# Allegro board prototype_rev1.brd
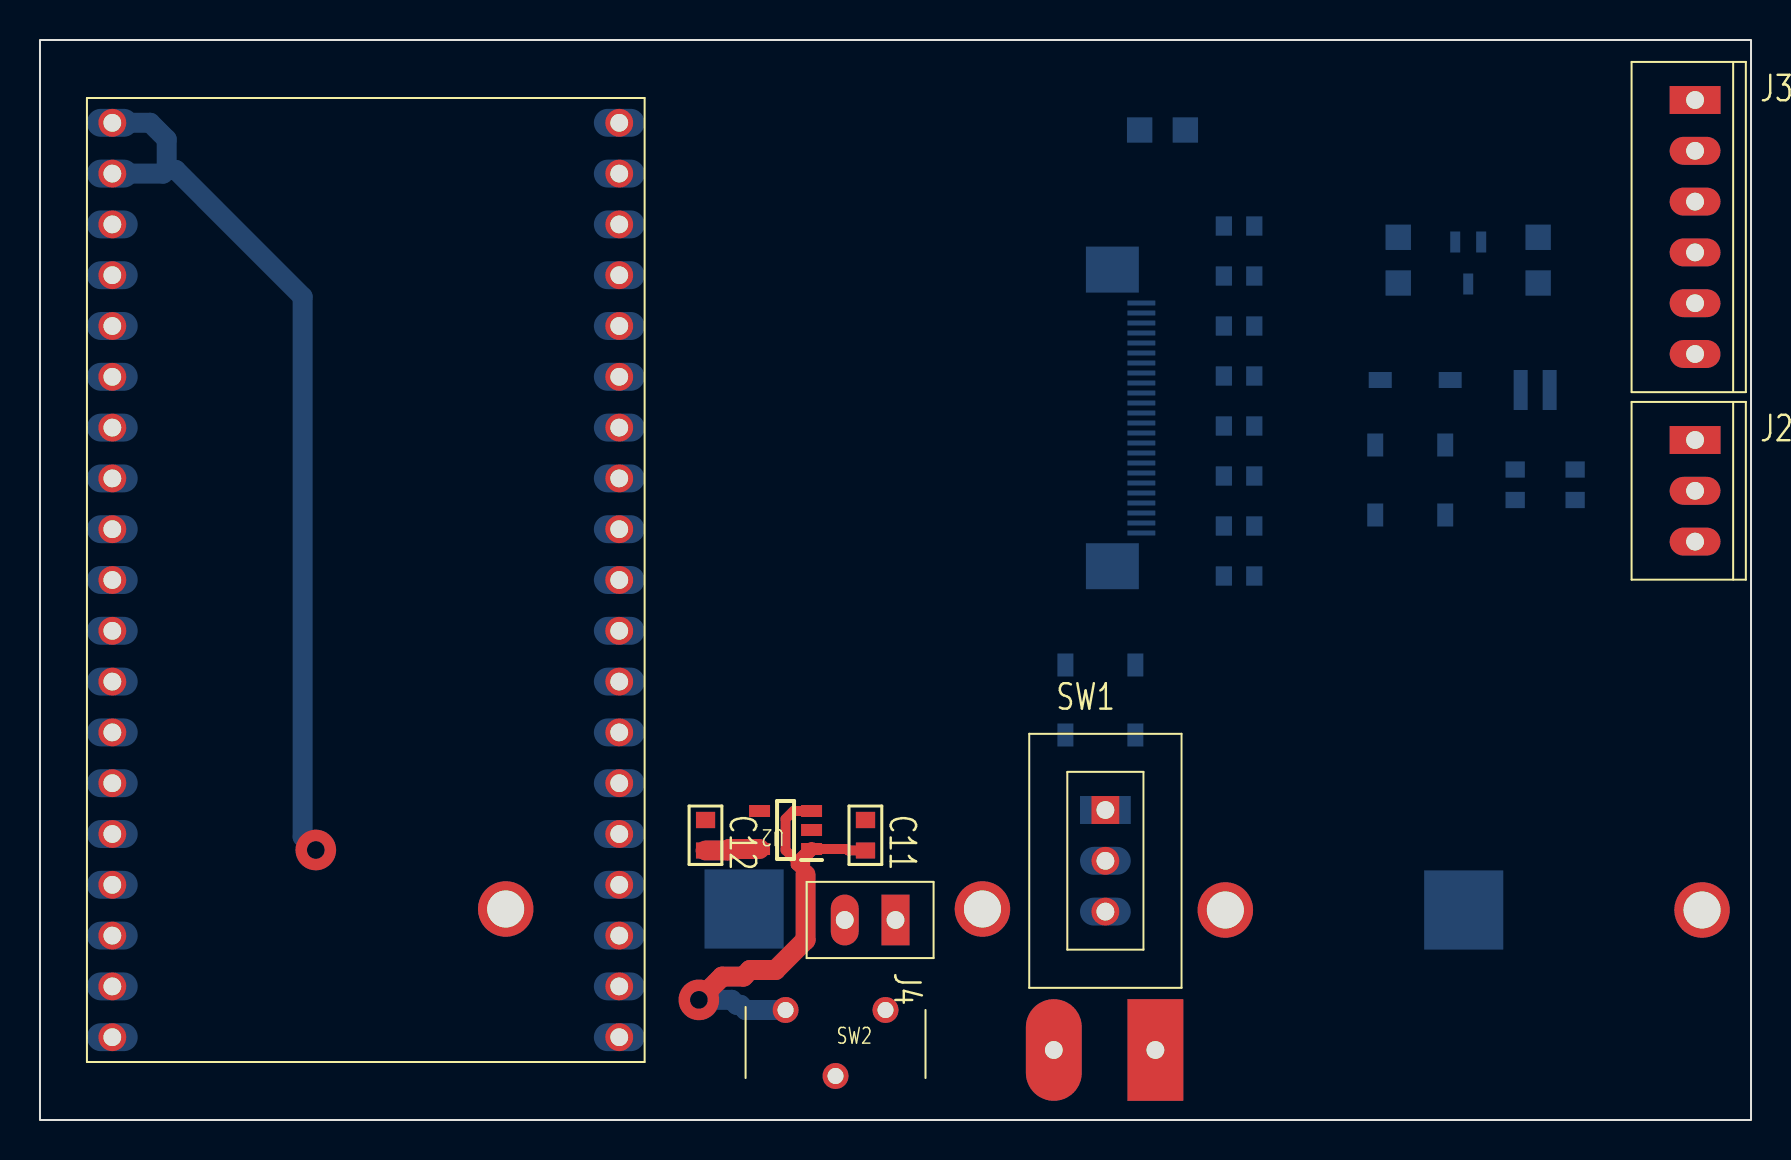
[diagram p0: board, top side]
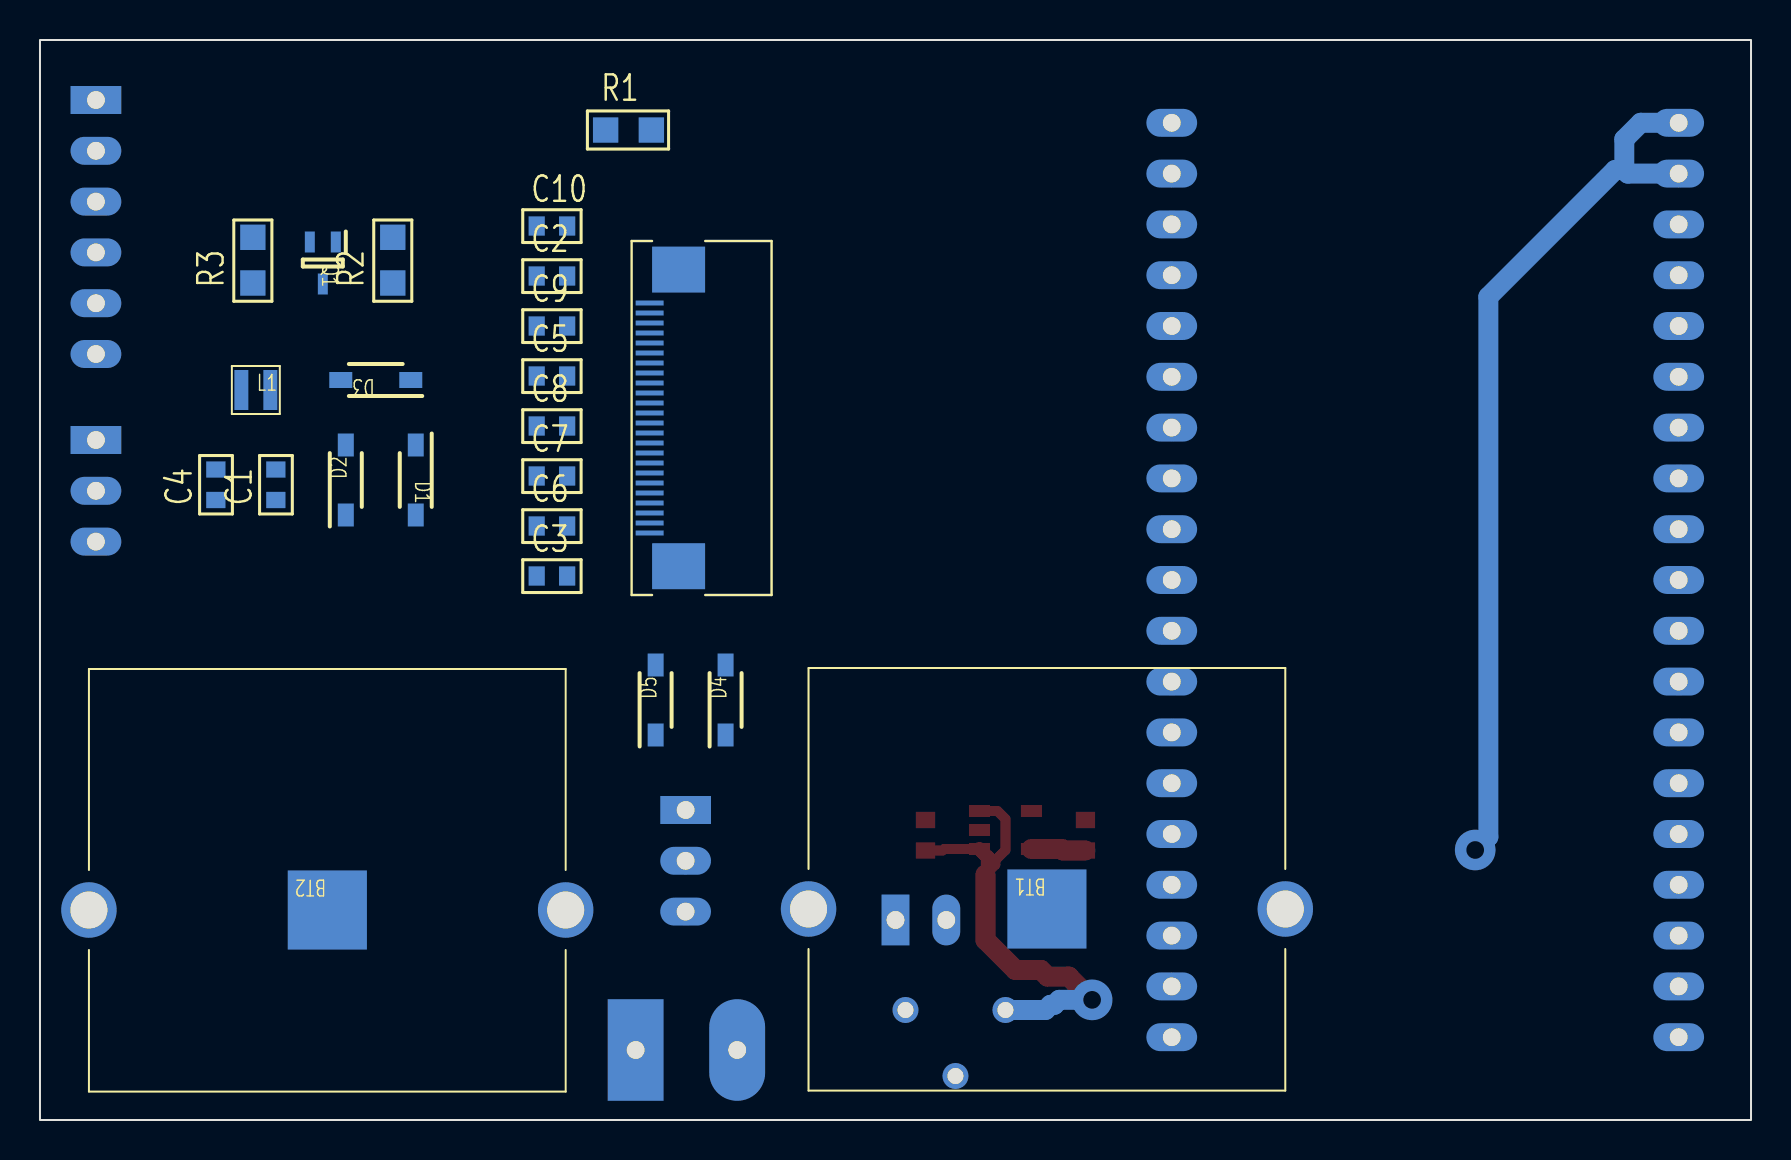
[diagram p1: board, bottom side, seen from below]

Outline 85.6 x 54 mm; copper layers: TOP, BOTTOM. Coordinates in mm from the lower left corner of the outline.
Outline path: rectangle 0,0 85.6,54

## Design rules (mm)
constraint set DEFAULT: min track width 0.254

## Placement (name value [footprint] x y rotation side)
BT1  Battery_Holder  [30212]  23.3 10.55 0 bottom
BT2  Battery_Holder  [30212]  59.3 10.5 0 bottom
C1  1u  [GU-C0603]  73.8 31 90 bottom
C2  1u / 50V  [GU-C0603]  60.75 42.2 180 bottom
C3  1u / 25V  [GU-C0603]  60.75 27.2 180 bottom
C4  4.7u  [GU-C0603]  76.8 31 90 bottom
C5  1u / 50V  [GU-C0603]  60.75 37.2 180 bottom
C6  1u / 25V  [GU-C0603]  60.75 29.7 180 bottom
C7  1u / 25V  [GU-C0603]  60.75 32.2 180 bottom
C8  1u / 25V  [GU-C0603]  60.75 34.7 180 bottom
C9  1u / 25V  [GU-C0603]  60.75 39.7 180 bottom
C10  1u / 25V  [GU-C0603]  60.75 44.7 180 bottom
C11  1u  [GU-C0603]  41.3 15 270 top
C12  1u  [GU-C0603]  33.3 15 270 top
D1  MBR0530T1  [SOD3716X135N]  66.8 32 270 bottom
D2  MBR0530T1  [SOD3716X135N]  70.3 32 90 bottom
D3  MBR0530T1  [SOD3716X135N]  68.8 37 0 bottom
D4  MBR0530T1  [SOD3716X135N]  51.3 21 90 bottom
D5  MBR0530T1  [SOD3716X135N]  54.8 21 90 bottom
J1  SFV24R-4STE1HLF  [AMPHENOL_SFV24R-4STE1HLF]  49 26.25 90 bottom
J2  VOLT TP  [GU-MOLEX3]  82.8 34 0 top
J3  SPI TP  [GU-MOLEX6]  82.8 51 0 top
J4  AMMETER TP  [GU-JUMPER2]  42.8 10 270 top
J5  EXT POWER  [GU-TERMINAL2-200]  55.8 3.5 270 top
L1  10uH  [NRH2412T2R2MNGH]  74.8 36.5 180 bottom
Q1  SI1308EDL-T1-BE3  [SOT65P210X110-3N]  71.45 42.85 270 bottom
R1  100k  [GU-R0805]  57.3 49.5 180 bottom
R2  10k  [GU-R0805]  67.95 41.85 90 bottom
R3  3R  [GU-R0805]  74.95 41.85 90 bottom
SW1  POWER SELECTOR  [GU-SW-SLIDE-SPDT]  53.3 15.5 0 top
SW2  -  [SSSS213100]  42.3 5.5 0 top
U1  ESP32-DevKitC  [ESP32-DEVKITC]  16.3 27 0 top
U2  MIC5317-3.3YM5-TR  [SOT95P280X100-5N]  37.3 14.5 180 top

## Library data of the parts
BT1 BT2 = Battery_Holder_9
C1-C12 = C
D1-D5 = MBR0530T1
J1 = SFV24R-4STE1HLF_0
J2 = CON3
J3 = CON6
J4 = JUMPER
J5 = CON2: User Part Number: TERMINAL2-200
L1 = L
Q1 = SI1308EDL-T1-BE3
R1-R3 = R
SW1 = SW SPDT
SW2 = SSSS213100
U1 = ESP32-DevKitC
U2 = MIC5317-3.3YM5-TR

## Footprints (pads in the part's own frame, mm; a bottom-side part is the same pattern mirrored in y, then rotated)
30212
  round 2.775 hole 1.85: 1(0,0) 2(23.85,0)
  rect 3.96x3.96 smd: NP1(11.925,0)
AMPHENOL_SFV24R-4STE1HLF
  rect 2.3x2.65 smd: (1.44,4.65) (16.27,4.65)
  rect 0.25x1.4 smd: 1(3.1,6.1) 2(3.6,6.1) 3(4.1,6.1) 4(4.6,6.1) 5(5.1,6.1) 6(5.6,6.1) 7(6.1,6.1) 8(6.6,6.1) 9(7.1,6.1) 10(7.6,6.1) 11(8.1,6.1) 12(8.6,6.1) 13(9.1,6.1) 14(9.6,6.1) 15(10.1,6.1) 16(10.6,6.1) 17(11.1,6.1) 18(11.6,6.1) 19(12.1,6.1) 20(12.6,6.1) 21(13.1,6.1) 22(13.6,6.1) 23(14.1,6.1) 24(14.6,6.1)
ESP32-DEVKITC
  round 1.397 hole 0.889: 1(-12.68,22.86) 2(-12.68,20.32) 3(-12.68,17.78) 4(-12.68,15.24) 5(-12.68,12.7) 6(-12.68,10.16) 7(-12.68,7.62) 8(-12.68,5.08) 9(-12.68,2.54) 10(-12.68,0) 11(-12.68,-2.54) 12(-12.68,-5.08) 13(-12.68,-7.62) 14(-12.68,-10.16) 15(-12.68,-12.7) 16(-12.68,-15.24) 17(-12.68,-17.78) 18(-12.68,-20.32) 19(-12.68,-22.86) 20(12.68,-22.86) 21(12.68,-20.32) 22(12.68,-17.78) 23(12.68,-15.24) 24(12.68,-12.7) 25(12.68,-10.16) 26(12.68,-7.62) 27(12.68,-5.08) 28(12.68,-2.54) 29(12.68,0) 30(12.68,2.54) 31(12.68,5.08) 32(12.68,7.62) 33(12.68,10.16) 34(12.68,12.7) 35(12.68,15.24) 36(12.68,17.78) 37(12.68,20.32) 38(12.68,22.86)
GU-C0603
  rect 0.813x0.965 smd: 1(0,0) 2(1.524,0)
GU-JUMPER2
  rect 2.54x1.397 hole 0.889: 1(0,0)
  oval 2.54x1.397 hole 0.889: 2(0,-2.54)
GU-MOLEX3
  rect 2.54x1.397 hole 0.889: 1(0,0)
  oval 2.54x1.397 hole 0.889: 2(0,-2.54) 3(0,-5.08)
GU-MOLEX6
  rect 2.54x1.397 hole 0.889: 1(0,0)
  oval 2.54x1.397 hole 0.889: 2(0,-2.54) 3(0,-5.08) 4(0,-7.62) 5(0,-10.16) 6(0,-12.7)
GU-R0805
  rect 1.27x1.27 smd: 1(0,0) 2(2.286,0)
GU-SW-SLIDE-SPDT
  rect 1.397x1.397 hole 0.889: 1(0,0)
  round 1.397 hole 0.889: 2(0,-2.54) 3(0,-5.08)
GU-TERMINAL2-200
  rect 5.08x2.794 hole 0.889: 1(0,0)
  oval 5.08x2.794 hole 0.889: 2(0,-5.08)
NRH2412T2R2MNGH
  rect 0.7x2 smd: 1(-0.725,0) 2(0.725,0)
SOD3716X135N
  rect 1.15x0.8 smd: 1(-1.75,0) 2(1.75,0)
SOT65P210X110-3N
  rect 1.05x0.5 smd: 1(-1.05,0.65) 2(-1.05,-0.65) 3(1.05,0)
SOT95P280X100-5N
  rect 1.05x0.6 smd: 1(-1.3,0.95) 2(-1.3,0) 3(-1.3,-0.95) 4(1.3,-0.95) 5(1.3,0.95)
SSSS213100
  round 1.3 hole 0.8: 1(0,0) 2(-2.5,-3.3) 3(-5,0)

## Nets
3V3: C4.2 C6.2 C12.2 J1.15 J1.16 J2.2 L1.1 R1.1 U1.1 U1.2 U2.5(VOUT)
GND: BT1.NP1 BT2.NP1 C2.1 C3.1 C4.1 C5.1 C6.1 C7.1 C8.1 C9.1 C10.1 C11.1 C12.1 D1.1(C) J1.8 J1.17 J2.1 J3.1 J5.1 R2.1 R3.1 U1.14 U1.32 U1.38 U2.2
VCC: C11.2 SW2.3(NO) U2.1 U2.3
BATT: D4.1(C) D5.1(C) J2.3 SW1.1
BUSY: J1.9 J3.4 U1.35
DC: J1.11 J3.5 U1.36
E-INK_CS: J1.12 J3.6 U1.29
EXT: J5.2 SW1.3(NO)
GDR: J1.2 Q1.1 R2.2
RESE: J1.3 Q1.2(S) R3.2
RESET: J1.10 R1.2 U1.34
SCL: J1.13 J3.2 U1.30
SDA: J1.14 J3.3 U1.37
VGH: C5.2 D3.1(C) J1.21
VGL: C2.2 D2.2 J1.23
N09940: C1.2 D3.2 L1.2 Q1.3
N26254: C1.1 D1.2 D2.1(C)
N26834: C10.2 J1.24
N27155: C9.2 J1.22
N27189: C8.2 J1.20
N27231: C7.2 J1.18
N27307: C3.2 J1.5
N33521: J4.1 SW1.2
N36276: J4.2 SW2.2
N72588: BT2.1 BT2.2 D5.2
N72605: BT1.1 BT1.2 D4.2

Pads without a net: J1 1 4 6 7 19; SW2 1; U1 3 4 5 6 7 8 9 10 11 12 13 15 16 17 18 19 20 21 22 23 24 25 26 27 28 31 33; U2 4

## Via types
v1: diameter 2.032, hole 0.889, TOP to BOTTOM, 2 vias

## Routing (per net, layer and track width the routed paths; a pad name or vN(x,y) marks a point on that pad's centre or on a via; arc(x,y) is an arc through that point)
3V3: length 47.5
  TOP w1: C12.2 34.41,13.48 34.48,13.55 U2.5
  BOTTOM w1: v1(13.8,13.5) 13.14,14.16 13.14,41.16 6.8,47.5 6.34,47.5 ; U1.2 6.16,47.32 6.34,47.5 ; 6.34,47.5 6.34,49.04 5.52,49.86 U1.1
VCC: length 23.3
  TOP w0.5: 38.3,12.27 37.81,12.76 37.81,12.98 37.3,13.49 37.3,15.05 37.7,15.45 U2.3 ; C11.2 40.44,13.48 40.37,13.55 U2.1 38.37,13.55
  TOP w0.7: 38.18,12.38 38.18,13.13 U2.1
  TOP w1: v1(32.96,6.01) 34.13,7.17 35.19,7.17 35.52,7.5 36.8,7.5 38.3,9 38.3,12.27
  BOTTOM w1: SW2.3 35.3,5.5 35.04,5.76 34.85,5.76 34.61,6.01 v1(32.96,6.01)
